# Altium PCB ch347-hs-usb-bridge.PcbDoc
Units mm, origin at the board's own origin, x right, y up, seen from the top; angles counter-clockwise.
Board outline 78 x 26 mm, 2 copper layers (Top Layer, Bottom Layer); 39 components, 42 nets, 181 pads, 159 vias.
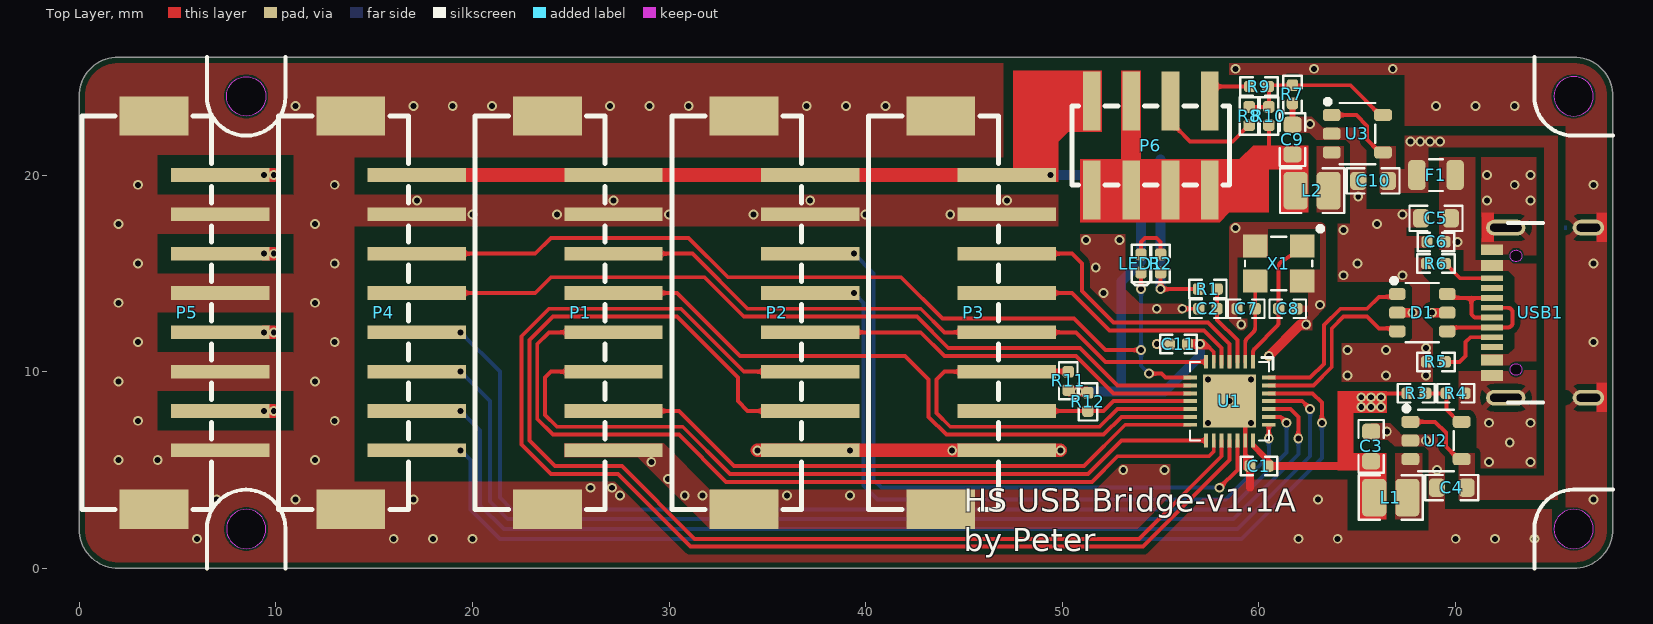
[diagram p0: Top Layer view]
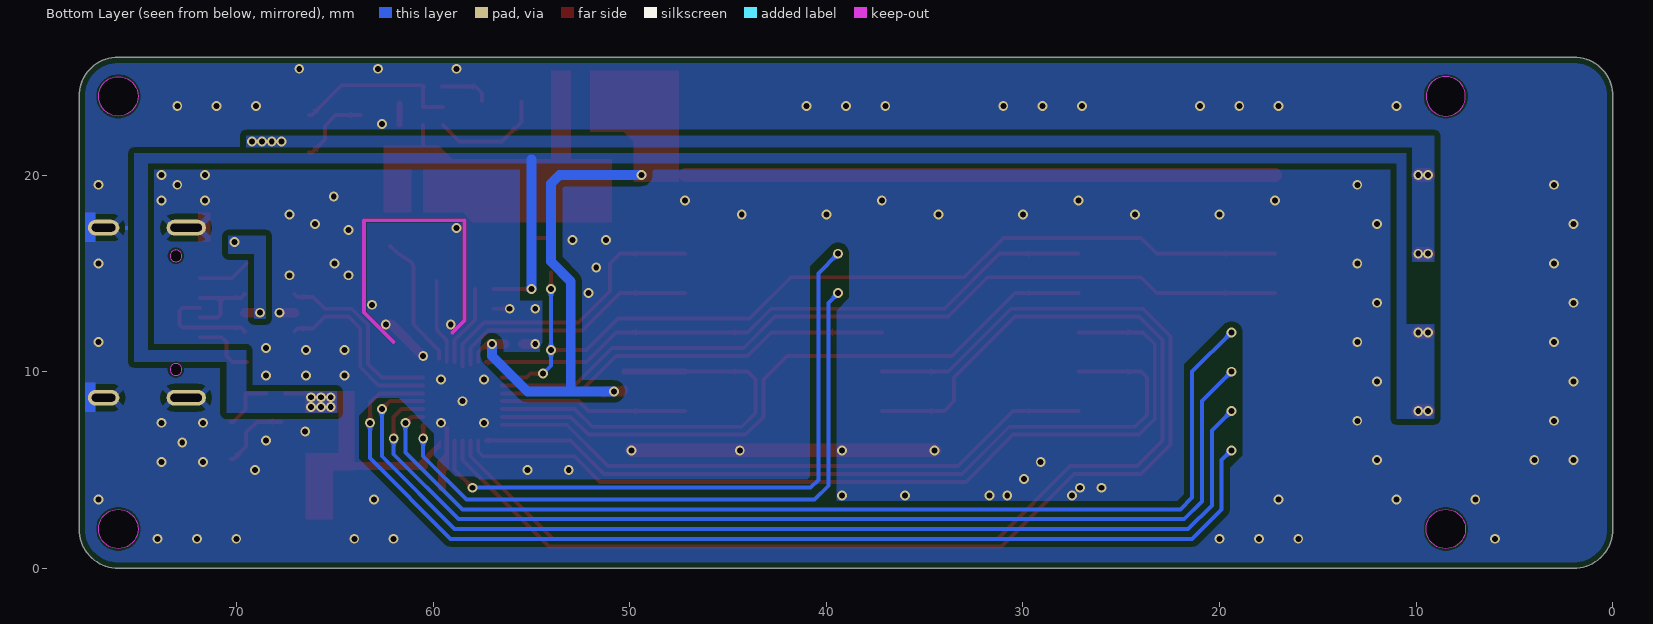
[diagram p1: Bottom Layer view, seen from below]
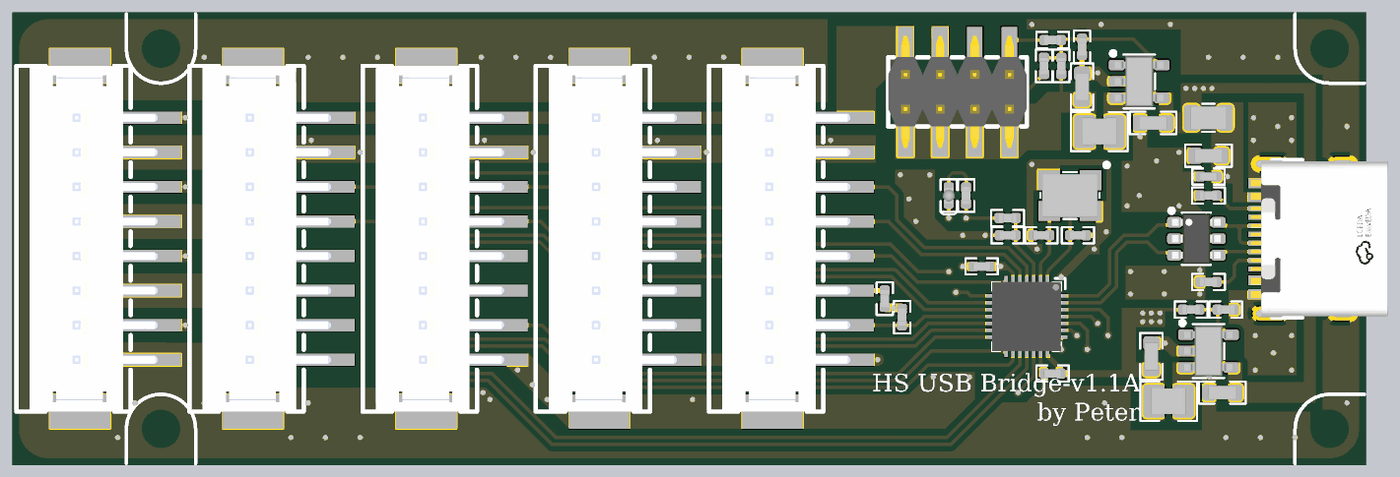
[diagram p2: 3D render of the assembled board from above, using the file's embedded part models]

## Layer stack, top to bottom
Top Solder: solder mask 0.0102, Solder Resist, Dk 3.5
Top Layer: signal copper 0.0356
Dielectric 1: dielectric 0.32, FR-4, Dk 4.8
Bottom Layer: signal copper 0.0356
Bottom Solder: solder mask 0.0102, Solder Resist, Dk 3.5

## Board outline
0,2 0,24 cw(c2,24) 2,26 76,26 cw(c76,24) 78,24 78,2 cw(c76,2) 76,0 2,0 cw(c2,2)
cut-out: 7.5,2 ccw(c8.5,2) 8.5,1 ccw(c8.5,2) 9.5,2 ccw(c8.5,2) 8.5,3 ccw(c8.5,2)
cut-out: 8.5,23 cw(c8.5,24) 7.5,24 cw(c8.5,24) 8.5,25 cw(c8.5,24) 9.5,24 cw(c8.5,24)
cut-out: 75,2 ccw(c76,2) 76,1 ccw(c76,2) 77,2 ccw(c76,2) 76,3 ccw(c76,2)
cut-out: 75,24 ccw(c76,24) 76,23 ccw(c76,24) 77,24 ccw(c76,24) 76,25 ccw(c76,24)

## Design rules (kind name [scope] priority, off if disabled: settings)
BoardOutlineClearance [All] p1: gap=0.3 ignorepadtopadclearanceinfootprint=FALSE except(0.1: Poly-CutoutEdge)
Clearance Clearance_1 [InNet('GND') And OnLayer('Bottom Layer') vs IsKeepOut] p1: gap=0.3 ignorepadtopadclearanceinfootprint=TRUE except(0: Track-Poly; 0.1: Poly-Region; 0.2: Arc-Arc Arc-Track Arc-SMDPad Arc-Via Track-Track Track-SMDPad Track-Via SMDPad-Via)
Clearance Clearance_2 [InNet('USB5V') vs InNet('NetR6_2') or InNet('GND') or InNet('B8') or InComponent('USB1')] p2: gap=0.3 ignorepadtopadclearanceinfootprint=TRUE except(0.1: Poly-Region; 0.225: SMDPad-Poly; 0.25: Track-Poly)
Clearance [All] p3: gap=0.3 ignorepadtopadclearanceinfootprint=TRUE except(0.1: Poly-Region; 0.2: Arc-Arc Arc-Track Arc-SMDPad Arc-Via Track-Track Track-SMDPad Track-Via SMDPad-Via)
DiffPairsRouting [All] p1: maxlimit=0.3 minlimit=0.15 mostfreqgap=0.2 toplayer_minwidth=0.15 toplayer_maxwidth=0.3 toplayer_prefwidth=0.2 bottomlayer_minwidth=0.15 bottomlayer_maxwidth=0.3 bottomlayer_prefwidth=0.2 maxuncoupledlength=5
HoleToHoleClearance [All] p1: gap=0.2 allowstackedmicrovias=TRUE
MinimumSolderMaskSliver [All] p1: minsoldermaskwidth=0.1
PolygonConnect PolygonConnect_1 [not InNet('GND')] p1: connectstyle=Direct reliefconductorwidth=0.254 reliefentries=4 polygonreliefangle="90 Angle" airgapwidth=0.254
PolygonConnect [All] p2: thpad.connectstyle=Relief thpad.reliefconductorwidth=0.3 thpad.reliefentries=4 thpad.polygonreliefangle="45 Angle" thpad.airgapwidth=0.3 smdpad.connectstyle=Direct smdpad.reliefconductorwidth=0.3 smdpad.reliefentries=4 smdpad.polygonreliefangle="90 Angle" smdpad.airgapwidth=0.3 via.connectstyle=Direct via.reliefconductorwidth=0.254 via.reliefentries=4 via.polygonreliefangle="90 Angle" via.airgapwidth=0.254
RoutingVias [All] p1: holewidth=0.3 width=0.5 viastyle="Through Hole" minholewidth=0.25 minwidth=0.4 maxholewidth=0.8 maxwidth=1
SilkToSolderMaskClearance [IsPad] p1: minsilkscreentomaskgap=0.1 clearancetoexposedcopper=TRUE
SolderMaskExpansion [All] p1: expansion=0.102 istentingtop=FALSE
Width [All] p1: maxlimit=1 minlimit=0.1 preferedwidth=0.3
26 further rules are at their usual default settings.

## Classes and differential pairs
component class type-c: C5 C6 D1 R5 R6 USB1
component class osc: C7 C8 X1
component class m3406: C3 C4 C9 C10 F1 L1 L2 R3 R4 R7 R8 R9 R10 U2 U3
component class interface: P1 P2 P3 P4 P5 P6
component class ch347f: C1 C2 C11 LED1 R1 R2 R11 R12 U1
differential pair UD: +UD_P -UD_N

## Components (designator, comment, footprint, x,y, rotation, side; value= is the part's Value field where it differs from the comment)
C1 "Capacitor" CAPC100X50X55L25N 60,5.2 r0 top value=100n
C2 "Capacitor" CAPC100X50X55L25N 57.4,13.2 r0 top value=100n
C3 "Capacitor" CAPC160X80X90L30N 65.7,6.2 r270 top value=10u
C4 "Capacitor" CAPC160X80X90L30N 69.8,4.1 r0 top value=10u
C5 "Capacitor" CAPC160X80X90L30N 69,17.8 r0 top value=10u
C6 "Capacitor" CAPC100X50X55L25N 69,16.6 r0 top value=100n
C7 "Capacitor" CAPC100X50X55L25N 59.348,13.2 r180 top value=10p
C8 "Capacitor" CAPC100X50X55L25N 61.462,13.2 r180 top value=10p
C9 "Capacitor" CAPC160X80X90L30N 61.7,21.8 r270 top value=10u
C10 "Capacitor" CAPC160X80X90L30N 65.8,19.7 r0 top value=10u
C11 "Capacitor" CAPC100X50X55L25N 55.9,11.4 r0 top value=100n
D1 "USBLC6-2SC6" fp-0018 68.3,13 r270 top
F1 "SMD0805B050TF" FUSC210X135X125L37N 69,20 r180 top
L1 "Inductor" INDC200X160X105L60N 66.7,3.6 r180 top value=2u2
L2 "Inductor" INDC200X160X105L60N 62.7,19.2 r180 top value=2u2
LED1 "蓝灯 正贴" LEDC100X50X45L25N 54,15.5 r90 top
P1 "SPI" CONN-SMD_PH2.0-8P-LT 25.5,13 r270 top
P2 "UART0/IO0_2" CONN-SMD_PH2.0-8P-LT 35.5,13 r270 top
P3 "UART1/I2C" CONN-SMD_PH2.0-8P-LT 45.5,13 r270 top
P4 "JTAG/SWD/IO3_7" CONN-SMD_PH2.0-8P-LT 15.5,13 r270 top
P5 "Power" CONN-SMD_PH2.0-8P-LT 5.5,13 r270 top
P6 "VIO SEL" CONN-SMD_HX-PZ2.0-2X4P-TP 54.5,21.5 r0 top
R1 "Resistor" RESC100X50X35L25N 57.4,14.2 r0 top value=4k7
R2 "Resistor" RESC100X50X35L25N 55,15.5 r90 top value=470
R3 "Resistor" RESC100X50X35L25N 68,8.9 r180 top value=100k
R4 "Resistor" RESC100X50X35L25N 70,8.9 r180 top value=22k1
R5 "Resistor" RESC100X50X35L25N 69,10.5 r180 top value=4k7
R6 "Resistor" RESC100X50X35L25N 69,15.5 r0 top value=4k7
R7 "Resistor" RESC100X50X35L25N 61.7,24.1 r90 top value=22k1
R8 "Resistor" RESC100X50X35L25N 59.5,23 r270 top value=237k
R9 "80.6k" RESC100X50X35L25N 60,24.5 r180 top value=20k
R10 "Resistor" RESC100X50X35L25N 60.5,23 r270 top value=100k
R11 "Resistor" RESC100X50X35L25N 50.3,9.535 r270 top value=4k7
R12 "Resistor" RESC100X50X35L25N 51.3,8.465 r90 top value=4k7
U1 "CH347F" QFN-28_L4.0-W4.0-P0.40-BL-EP2.7 58.5,8.5 r180 top
U2 "M3406-ADJ" SOT23-5P95_280X110L37X40N 69,6.5 r270 top
U3 "M3406-ADJ" SOT23-5P95_280X110L37X40N 65,22.1 r270 top
USB1 "USB-TYPE-C-018" USB-TYPE-C-018 74.3,13 r90 top
X1 "TAXM8M4RDBCCT2T" OSCCC320X250X80L90X100N 61,15.5 r180 top

## Footprints (in the part's own frame and the unit in brackets; to place one, negate y for a bottom-side part, rotate by r counter-clockwise, add the part's x,y. Pads: shape width x height; smd on the part's side, far side on the other; paste and mask are expansions set on the pad)
CAPC100X50X55L25N [mm] "Capacitor, Chip; 1.00 mm L X 0.50 mm W X 0.55 mm H body"
  rrect50% 0.575x0.58 smd: 1(-0.462,0) 2(0.462,0)
  silkscreen extent -0.93,-0.47 0.93,0.47, body extent -0.5,-0.25 0.5,0.25, height 0.55
CAPC160X80X90L30N [mm] "Capacitor, Chip; 1.60 mm L X 0.80 mm W X 0.90 mm H body"
  rrect49% 0.82x0.929 smd: 1(-0.755,0) 2(0.755,0)
  silkscreen extent -1.35,-0.64 1.35,0.64, body extent -0.8,-0.4 0.8,0.4, height 0.9
CONN-SMD_HX-PZ2.0-2X4P-TP [mm]
  rect 0.89x3 smd: 1(-3,2.25) 2(-1,2.25) 3(1,2.25) 4(3,2.25) 5(3,-2.25) 6(1,-2.25) 7(-1,-2.25) 8(-3,-2.25)
  silkscreen extent -4,-2 4,2, body extent -4,-3.25 4,3.25, height 6.3
CONN-SMD_PH2.0-8P-LT [mm]
  rect 0.7x5 smd paste+0 mask+0.05: 1(-7,1.679) 2(-5,1.679) 3(-3,1.679) 4(-1,1.679) 5(1,1.679) 6(3,1.679) 7(5,1.679) 8(7,1.679)
  rect 2x3.5 smd paste+0 mask+0.05: 9(-10,-1.679) 10(10,-1.679)
  silkscreen extent -10,-5.35 10,1.25, body extent -10,-4.59 10,2.81, height 6.55
fp-0018 [mm] "SOT23-6P95_280X125L45X40N, Small Outline Transistor, SOT-23 Type, 0.95 mm pitch; 6 pin, 2.92 mm L X 1.60 mm W X 1.25 mm H body"
  rrect50% 0.609x0.835 smd: 1(-0.95,-1.268) 2(0,-1.268) 3(0.95,-1.268) 4(0.95,1.268) 5(0,1.268) 6(-0.95,1.268)
  silkscreen extent -1.75,-1.56 1.51,0.85, body extent -1.46,-1.4 1.46,1.4, height 1.25
FUSC210X135X125L37N [mm] "Fuse, Chip; 2.10 mm L X 1.35 mm W X 1.25 mm H body"
  rrect46% 0.879x1.52 smd: 1(-0.975,0) 2(0.975,0)
  silkscreen extent -0.36,-0.81 0.36,0.81, body extent -1.05,-0.67 1.05,0.67, height 1.25
INDC200X160X105L60N [mm] "Inductor, Chip; 2.00 mm L X 1.60 mm W X 1.05 mm H body"
  rrect33% 1.226x1.91 smd: 1(-0.842,0) 2(0.842,0)
  silkscreen extent -1.64,-1.13 1.64,1.13, body extent -1,-0.8 1,0.8, height 1.05
LEDC100X50X45L25N [mm] "LED, Chip; 1.00 mm L X 0.50 mm W X 0.45 mm H body"
  rrect50% 0.6x0.58 smd: A(0.465,0) C(-0.465,0)
  silkscreen extent -1.1,-0.47 0.94,0.47, body extent -0.5,-0.35 0.5,0.35, height 0.8
OSCCC320X250X80L90X100N [mm] "Oscillator, Corner Concave; 3.20 mm L X 2.50 mm W X 0.80 mm H body"
  rect 1.249x1.149 smd: 1(-1.19,-0.89) 2(1.19,-0.89) 3(1.19,0.89) 4(-1.19,0.89)
  silkscreen extent -2.24,-1.89 1.71,1.36, body extent -1.6,-1.25 1.6,1.25, height 0.85
QFN-28_L4.0-W4.0-P0.40-BL-EP2.7 [mm]
  rect 0.2x0.7 smd paste-100 mask+0.051: 1(-1.2,-2) 2(-0.8,-2) 3(-0.4,-2) 4(-0.001,-2) 5(0.4,-2) 6(0.8,-2) 7(1.2,-2) 15(1.2,2) 16(0.8,2) 17(0.4,2) 18(0,2) 19(-0.4,2) 20(-0.8,2) 21(-1.2,2)
  rect 0.7x0.2 smd paste-100 mask+0.051: 8(2,-1.2) 9(2,-0.8) 10(2,-0.4) 11(1.999,0) 12(2,0.4) 13(2,0.8) 14(2,1.2) 22(-2,1.2) 23(-2,0.8) 24(-2,0.4) 25(-2,0) 26(-2,-0.4) 27(-2,-0.8) 28(-2,-1.2)
  rect 2.7x2.7 smd paste-100 mask+0.051: 29(0,0)
  silkscreen extent -2.22,-2.21 2,2, body extent -2.01,-2.01 2.01,2.01, height 0.75
RESC100X50X35L25N [mm] "Resistor, Chip; 1.00 mm L X 0.50 mm W X 0.35 mm H body"
  rrect50% 0.6x0.58 smd: 1(-0.465,0) 2(0.465,0)
  silkscreen extent -0.94,-0.47 0.94,0.47, body extent -0.5,-0.25 0.5,0.25, height 0.35
SOT23-5P95_280X110L37X40N [mm] "Small Outline Transistor, SOT-23 Type, 0.95 mm pitch; 5 pin, 2.90 mm L X 1.60 mm W X 1.10 mm H body"
  rrect50% 0.609x0.905 smd: 1(-0.95,-1.303) 2(0,-1.303) 3(0.95,-1.303) 4(0.95,1.303) 5(-0.95,1.303)
  silkscreen extent -1.75,-1.63 1.56,0.91, body extent -1.45,-1.4 1.45,1.4, height 1.1
USB-TYPE-C-018 [mm]
  rect 0.3x1.1 smd mask+0.05: A1(-3.325,2.45) A4(-2.525,2.45) A5(-1.25,2.45) A6(-0.25,2.45) A7(0.25,2.45) A8(1.25,2.45) A9(2.525,2.45) A12(3.325,2.45) B1(3.075,2.45) B4(2.275,2.45) B5(1.75,2.45) B6(0.75,2.45) B7(-0.75,2.45) B8(-1.75,2.45) B9(-2.275,2.45) B12(-3.075,2.45)
  oval 0.8x1.6 hole 0.4 slot 1.2 at 90 deg: SH1(-4.325,-2.45) SH2(4.325,-2.45)
  oval 0.8x2 hole 0.4 slot 1.6 at 90 deg: SH3(4.325,1.75) SH4(-4.325,1.75)
  Keep-Out Layer board cut-out: -2.89,0.93 -3.005,0.953 -3.102,1.018 -3.167,1.115 -3.19,1.23 -3.19,1.23 -3.167,1.345 -3.102,1.442 -3.005,1.507 -2.89,1.53 -2.89,1.53 -2.775,1.507 -2.678,1.442 -2.613,1.345 -2.59,1.23 -2.59,1.23 -2.613,1.115 -2.678,1.018 -2.775,0.953 -2.89,0.93
  Keep-Out Layer board cut-out: 2.89,0.93 2.775,0.953 2.678,1.018 2.613,1.115 2.59,1.23 2.59,1.23 2.613,1.345 2.678,1.442 2.775,1.507 2.89,1.53 2.89,1.53 3.005,1.507 3.102,1.442 3.167,1.345 3.19,1.23 3.19,1.23 3.167,1.115 3.102,1.018 3.005,0.953 2.89,0.93
  silkscreen extent -4.57,-0.14 4.57,1.64, body extent -4.47,-5.05 4.47,2.85, height 3.25

## Part data
C1 C2 C6 C11: library part GRM188R61E106KA73D, Case/Package=0402, Manufacturer=CCTC(三环), MPN=TCC0402X5R104M250AT, Mounting Type=SMD, 编号=C359190
C3 C4 C5 C9 C10: library part GRM188R61E106KA73D, Case/Package=0603, Manufacturer=CCTC(三环), MPN=TCC0603X5R106K100CT, Mounting Type=SMD, 编号=C380314
C7 C8: library part GRM188R61E106KA73D, Case/Package=0402, Manufacturer=YAGEO(国巨), MPN=CC0402JRNPO9BN100, Mounting Type=SMD, 编号=C106199
D1: library part CMP-0000065, "15V 6V SOT-23-6 Electrostatic and Surge Protection (TVS/ESD) ROHS", LCSC PN=C2687116, Manufacturer=UMW, Category=TVS/ESD, ComponentLink1Description="Product Link", ComponentLink1URL=https://www.lcsc.com/product-detail/Electrostatic-and-Surge-Protection-TVS-ESD_UMW-Youtai-Semiconductor-Co-Ltd-USBLC6-2SC6_C2687116.html, ComponentLink2Description="Datasheet Link", ComponentLink2URL=https://datasheet.lcsc.com/lcsc/2311091738_UMW-Youtai-Semiconductor-Co---Ltd--USBLC6-2SC6_C2687116.pdf, CPN=000000, ID=CMP-0000065, MPN=USBLC6-2SC6
F1: library part "Fuse 1", "Fuse", 编号=C269104
L1 L2: library part WPN201610U2R2MTY01, Case/Package=201610, Manufacturer=DDY(德立), MPN=SFE201610-2R2M, Mounting Type=SMD, 编号=C5159659
LED1: library part LED-SMD, "贴片LED", 编号=C965795
P1 P2 P3 P4 P5: library part "Header 8", "Header, 8-Pin", LatestRevisionDate=17-Jul-2002, LatestRevisionNote="Re-released for DXP Platform.", Publisher="Altium Limited"
P6: library part "Header 4X2A", "Header, 4-Pin, Dual row", LatestRevisionDate=17-Jul-2002, LatestRevisionNote="Re-released for DXP Platform.", Publisher="Altium Limited"
R1 R5 R6 R11 R12: library part RC0402FR-07100KL, Case/Package=0402, Manufacturer=RALEC(旺诠), MPN=RTT02472JTH, Mounting Type=SMD, 编号=C103059
R2: library part RC0402FR-07100KL, Case/Package=0402, Manufacturer=RALEC(旺诠), MPN=RTT02471JTH, Mounting Type=SMD, 编号=C103058
R3 R10: library part RC0402FR-07100KL, Case/Package=0402, Manufacturer=RALEC(旺诠), MPN=RTT021003FTH, Mounting Type=SMD, 编号=C102750
R4 R7: library part RC0402FR-0722K1L, Case/Package=0402, Manufacturer=RALEC(旺诠), MPN=RTT022212FTH, Mounting Type=SMD, 编号=C102896
R8: library part RC0402FR-07100KL, Case/Package=0402, Manufacturer=UNI-ROYAL(厚声), MPN=0402WGF2373TCE, Mounting Type=SMD, 编号=C27001
R9: library part RC0402FR-07100KL, Case/Package=0402, Manufacturer=FH(风华), MPN=RC-02W8062FT, Mounting Type=SMD, 编号=C304637
U1: "High Speed USB to UART + SPI + IIC + JTAG"
U2 U3: "Vin=2V~6V,800mA,DCDC", Manufacturer=西安航天民芯, Mounting Type=SMD, MPN=M3406-ADJ, 编号=C83224
X1: library part X32258MSB4SI, "8MHz ±10ppm 10pF", Manufacturer=TAE(雅晶鑫), 编号=C400090
USB1: 编号=C2927038

## Via types
v1: diameter 0.5, hole 0.3, Top Layer to Bottom Layer, tented both sides, 159 vias

## Nets (pads, with @x,y where several pads share a name; then routed paths per layer and width w, separated by ;. In a path a pad name is that pad's centre, name@x,y a point inside that pad or via, vN(x,y) a via of type N, cw(c..) or ccw(c..) an arc to the next point about the centre after c; other vN are vias at no path point)
1V8: P6.4 R9.2 | length 2.6
  Top Layer w0.2: P6.4 57.5,24.155 57.845,24.5 R9.2
2V5: P6.3 R8.2 | length 5.8
  Top Layer w0.2: P6.3 55.5,22.695 55.845,22.35 55.85,22.35 56.5,21.7 58.665,21.7 R8.2
3V3: C1.2 C3.2 L1.2 P5.5 P5.7 R1.1 R2.1 R3.2 U1.21 | length 15.1
  Top Layer w0.2: R2.1 v1(55,14.2) R1.1 ; 66.4,8.9 R3.2
  Top Layer w0.4: C1.2 64.1,5.2
  Top Layer w0.7: v1(9.4,8) v1(9.9,8) ; v1(9.4,12) v1(9.9,12)
  Bottom Layer w0.5: v1(55,14.2) 55,20.8
  other v1: 65.2,8.2 65.7,8.2 66.2,8.2 65.2,8.7 65.7,8.7 66.2,8.7
5V: C4.2 C10.2 F1.2 P5.1 P5.3 U2.1 U2.4 U3.1 U3.4 | length 8.6
  Top Layer w0.2: U3.1 64.95,23.05 65.5,22.5 65.5,21.8 66.15,21.15 U3.4 ; U2.1 68.95,7.45 69.5,6.9 69.5,6.2 70.15,5.55 U2.4
  Top Layer w0.7: v1(9.4,16) v1(9.9,16) ; v1(9.4,20) v1(9.9,20)
  other v1: 67.7,21.7 68.2,21.7 68.7,21.7 69.2,21.7
CTS0/IO0: P2.7 U1.17 | length 62.4
  Top Layer w0.2: P2.7 34,8 33.5,8.5 33.5,9.7 30.4,12.8 24.1,12.8 22.9,11.6 22.9,6.5 24.2,5.2 27.6,5.2 31.3,1.5 53.9,1.5 58.1,5.7 U1.17
D+: D1.6 USB1.A6 USB1.B6 | length 4.4
  Top Layer w0.2: D1.6@69.613,13.95 D1.6 69.768,13.75 70.8,13.75 ; USB1.A6 71.05,12.75 cw(c71.05,13) 70.8,13 70.8,13.75 ; USB1.B6 70.8,13.75
D-: D1.4 USB1.A7 USB1.B7 | length 5.3
  Top Layer w0.2: D1.4@69.613,12.05 D1.4 69.768,12.25 USB1.B7 72.65,12.25 ccw(c72.65,12.5) 72.9,12.5 72.9,13 ccw(c72.65,13) 72.65,13.25 USB1.A7
DTR0/TNOW0/IO2: P2.5 U1.10 | length 20.6
  Top Layer w0.2: P2.5 42.8,12 44,10.8 50.7,10.8 52.6,8.9 U1.10
GND: C1.1 C2.1 C3.1 C4.1 C5.1 C6.1 C7.2 C8.1 C9.1 C10.1 C11.1 D1.2 P1.2 P1.8 P1.9 P1.10 P2.2 P2.8 P2.9 P2.10 P3.2 P3.8 P3.9 P3.10 P4.2 P4.9 P4.10 P5.2 P5.4 P5.6 P5.8 P5.9 P5.10 R4.1 R5.2 R6.1 R7.1 U1.20 U1.29 U2.2 U3.2 USB1.A1 USB1.A12 USB1.B1 USB1.B12 USB1.SH1 USB1.SH2 USB1.SH3 USB1.SH4 X1.2 X1.4 | length 22.4
  Top Layer w0.2: v1(56.101,13.2) C2.1
  Top Layer w0.3: C9.1 R7.1
  Top Layer w0.4: 59.538,4.1 C1.1
  Top Layer w0.5: v1(54.8,11.4) C11.1 ; v1(60.5,10.8) 62.1,12.4 v1(62.4,12.4) v1@62.42,12.4 ; D1.2 v1(67.8,13)
  Top Layer w0.7: v1(34.5,6) P2.8 P3.8 v1(49.9,6)
  other v1: 6,1.5 16,1.5 18,1.5 20,1.5 62,1.5 64,1.5 70,1.5 72,1.5 74,1.5 7,3.5 11,3.5 17,3.5 63,3.5 77,3.5 27.5,3.7 30.8,3.7 31.7,3.7 36,3.7 39.2,3.7 26,4.1 27.1,4.1 29.95,4.55 53.1,5 55.2,5 69.045,5 29.1,5.4 71.7,5.4 73.8,5.4 2,5.5 4,5.5 12,5.5 39.2,6 44.4,6 72.75,6.4 68.5,6.5 66.5,6.955 57.4,7.4 59.6,7.4 71.7,7.4 73.8,7.4 3,7.5 13,7.5 58.5,8.5 2,9.5 12,9.5 57.4,9.6 59.6,9.6 64.5,9.8 66.45,9.8 68.5,9.8 64.5,11.1 66.45,11.1 68.5,11.2 3,11.5 13,11.5 77,11.5 59.1,12.4 54.8,13.2 63.1,13.4 2,13.5 12,13.5 52.1,14 64.3,14.9 67.3,14.9 51.7,15.3 3,15.5 13,15.5 65,15.5 77,15.5 51.2,16.7 52.9,16.7 64.3,17.2 58.8,17.3 2,17.5 12,17.5 66,17.5 20,18 24.3,18 30,18 34.3,18 40,18 44.3,18 67.3,18 17.179,18.7 27.179,18.7 37.179,18.7 47.179,18.7 71.6,18.7 73.8,18.7 65.045,18.9 3,19.5 13,19.5 73,19.5 77,19.5 71.6,20 73.8,20 62.6,22.6 11,23.5 17,23.5 19,23.5 21,23.5 27,23.5 29,23.5 31,23.5 37,23.5 39,23.5 41,23.5 69,23.5 71,23.5 73,23.5 58.8,25.4 62.8,25.4 66.8,25.4
INT_VIO: C9.2 L2.2 P6.2 P6.5 P6.6 P6.7 P6.8 R10.2 | length 1.3
  Top Layer w0.2: 60.5,21.254 R10.2
MISO: P1.6 U1.15 | length 41.1
  Top Layer w0.2: P1.6 24,10 23.7,9.7 23.7,7.8 24.3,7.2 30.7,7.2 33.1,4.8 51.3,4.8 53,6.5 U1.15
MOSI: P1.5 U1.16 | length 44.8
  Top Layer w0.2: P1.5 23.9,12 23.3,11.4 23.3,7.6 24.1,6.8 30.5,6.8 32.9,4.4 51.5,4.4 52.8,5.7 57.45,5.7 57.7,5.95 U1.16
NetC2_2: C2.2 R1.2 U1.3 | length 4.1
  Top Layer w0.2: R1.2 57.863,14.198 57.863,13.201 C2.2 57.862,12.638 58.9,11.6 U1.3
NetC7_1: C7.1 U1.2 X1.3 | length 4.3
  Top Layer w0.2: U1.2 59.3,11.476 cw(c59.6,11.476) 59.388,11.688 59.722,12.022 ccw(c59.51,12.234) 59.81,12.234 C7.1 X1.3
NetC8_2: C8.2 U1.1 X1.1 | length 6.8
  Top Layer w0.2: U1.1@59.7,10.674 59.7,10.976 cw(c60,10.976) 59.787,11.187 60.913,12.313 ccw(c60.7,12.524) 61,12.524 61,15.337 cw(c61.3,15.337) 61.136,15.589 61.716,15.966 X1.1
NetL1_1: L1.1 U2.3
NetL2_1: L2.1 U3.3
NetLED1_A: LED1.A R2.2 | length 2.4
  Top Layer w0.2: LED1.A 54,16.6 54.2,16.8 54.8,16.8 55,16.6 R2.2
NetR3_1: R3.1 R4.2 U2.5 | length 2.9
  Top Layer w0.2: R3.1 R4.2 69.535,8.07 70.155,7.45 U2.5
NetR5_1: R5.1 USB1.A5 | length 3.3
  Top Layer w0.2: R5.1 70.2,10.5 70.5,10.8 70.5,11.5 70.75,11.75 USB1.A5
NetR6_2: R6.2 USB1.B5 | length 2.7
  Top Layer w0.2: R6.2@69.475,15.5 70.225,14.75 USB1.B5
NetR7_2: R7.2 R8.1 R9.1 R10.1 U3.5 | length 8.5
  Top Layer w0.2: R8.1 R10.1 60.5,24.465 R9.1 60.53,24.565 R7.2 64.646,24.565 66.161,23.05 U3.5
RTS0/IO1: P2.6 U1.18 | length 63.1
  Top Layer w0.2: P2.6 33.8,10 30.6,13.2 23.9,13.2 22.5,11.8 22.5,6.3 24,4.8 27.4,4.8 31.1,1.1 54.1,1.1 58.5,5.5 U1.18
RXD0: P2.4 U1.22 | length 33.4
  Top Layer w0.2: v1(60.5,6.6) U1.22
  Bottom Layer w0.2: v1(39.4,14) 39.9,13.5 39.9,4.2 40.6,3.5 58.3,3.5 60.5,5.7 v1(60.5,6.6)
RXD1: P3.4 U1.5 | length 12.9
  Top Layer w0.2: P3.4 50.5,14 52.4,12.1 57.2,12.1 58.1,11.2 U1.5@58.1,10.366
SCK: P1.7 U1.14 | length 31.4
  Top Layer w0.2: P1.7 30.5,8 33.3,5.2 51.1,5.2 53.2,7.3 U1.14
SCL/CTS1: P3.7 R12.1 U1.11 | length 9.5
  Top Layer w0.2: P3.7 R12.1 52.1,8 52.6,8.5 U1.11
SCS0: P1.4 U1.13 | length 33.8
  Top Layer w0.2: P1.4 30.4,14 33.6,10.8 42,10.8 43.2,9.6 43.2,7.7 44.1,6.8 52.1,6.8 53,7.7 U1.13
SCS1/DTR1/TNOW1: P1.3 P3.5 U1.7 | length 32.4
  Top Layer w0.2: P1.3 31.2,16 34,13.2 42.8,13.2 44,12 P3.5 50.7,12 52.2,10.5 U1.7
SDA/RTS1: P3.6 R11.1 U1.12 | length 22.1
  Top Layer w0.2: P3.6 44,10 43.6,9.6 43.6,7.9 44.3,7.2 51.9,7.2 52.8,8.1 U1.12
  Top Layer w0.3: P3.6 R11.1
SRST/ACT: LED1.C P4.3 U1.8 | length 47
  Top Layer w0.2: P4.3 23.2,16 24,16.8 31,16.8 33,14.8 41.8,14.8 43.9,12.7 50.6,12.7 52.2,11.1 v1(54,11.1) ; v1(54,14.2) LED1.C ; v1(54.4,9.9) 55.05,9.9 55.25,9.7 U1.8
  Bottom Layer w0.2: v1(54,14.2) 54,10.3 v1(54.4,9.9)
TCK/SWDCK/IO4: P4.5 U1.23 | length 53.2
  Top Layer w0.2: U1.23 61.1,7.7 v1(61.4,7.4)
  Bottom Layer w0.2: v1(19.4,12) 21.4,10 21.4,3.6 22,3 58.5,3 61.4,5.9 v1(61.4,7.4)
TDI/IO6: P4.7 U1.25 | length 54.1
  Top Layer w0.2: U1.25 62.2,8.5 v1(62.6,8.1)
  Bottom Layer w0.2: v1(19.4,8) 20.4,7 20.4,3.2 21.6,2 58.9,2 62.6,5.7 v1(62.6,8.1)
TDO/IO5: P4.6 U1.24 | length 53.6
  Top Layer w0.2: U1.24 61.6,8.1 62,7.7 v1(62,6.6)
  Bottom Layer w0.2: v1(19.4,10) 20.9,8.5 20.9,3.4 21.8,2.5 58.7,2.5 62,5.8 v1(62,6.6)
TMS/SWDIO/IO7: P4.8 U1.26 | length 54.5
  Top Layer w0.2: U1.26 62.725,8.9 63.2,8.424 v1(63.2,7.4)
  Bottom Layer w0.2: v1(19.4,6) 19.9,5.5 19.9,3 21.4,1.5 59.1,1.5 63.2,5.6 v1(63.2,7.4)
TRST/IO3: P4.4 U1.9 | length 41.9
  Top Layer w0.2: P4.4 23.2,14 24,14.8 31.8,14.8 33.8,12.8 42.6,12.8 44.2,11.2 50.9,11.2 52.8,9.3 U1.9
TXD0: P2.3 U1.19 | length 32.5
  Top Layer w0.2: v1(58,4.1) 58.9,5 U1.19
  Bottom Layer w0.2: v1(39.4,16) 40.4,15 40.4,4.5 40.8,4.1 v1(58,4.1)
TXD1: P3.3 U1.4 | length 15.2
  Top Layer w0.2: P3.3 50.5,16 51,15.5 51,14.1 52.6,12.5 57.4,12.5 58.501,11.399 U1.4@58.501,10.253
UD_N: D1.3 U1.27 | length 9.4
  Top Layer w0.2: U1.27@60.5,9.3 62.766,9.3 63.7,10.234 63.7,12.2 64.3,12.8 65.5,12.8 66.098,12.202 66.88,12.202 D1.3
UD_P: D1.1 U1.28 | length 9.4
  Top Layer w0.2: U1.28 62.6,9.7 63.3,10.4 63.3,12.366 64.134,13.2 65.5,13.2 66.098,13.798 66.88,13.798 D1.1
USB5V: C5.2 C6.2 D1.5 F1.1 USB1.A4 USB1.A9 USB1.B4 USB1.B9 | length 0.8
  Top Layer w0.5: v1(68.8,13) D1.5
  other v1: 70.1,16.6
VIO: C11.2 P1.1 P2.1 P3.1 P4.1 P6.1 R11.2 R12.2 U1.6 | length 56.4
  Top Layer w0.2: v1(57,11.4) 57.05,11.35 57.35,11.35 57.7,11 U1.6@57.7,10.502
  Top Layer w0.5: R11.2 50.3,9.06 50.34,9.02 50.35,9.02 50.37,9 v1(50.8,9) 51.23,9 51.25,8.98 51.26,8.98 51.3,8.94 R12.2 ; C11.2 v1(57,11.4)
  Top Layer w0.7: P4.1 P1.1 P2.1 P3.1
  Bottom Layer w0.5: v1(49.4,20) 53.561,20 54,19.561 54,15.6 53,14.6 53,9 ; v1(50.8,9) 53,9 ; v1(57,11.4) 57,10.8 55.2,9 53,9
pads on no net: USB1.A8 USB1.B8

## Polygon pours and split planes (outlines as drawn)
GND on Top Layer "GND_L01_P017" (solid, remove dead copper, pour order 17): 56.101,13.448 53.952,13.448 53.2,14.2 53.2,17 50.9,17 50.9,14.5 52.448,12.952 56.101,12.952
GND on Top Layer "GND_L01_P011" (solid, remove dead copper, pour order 11): 47,20.9 14,20.9 14,19 49.8,19 49.8,17.4 14,17.4 14,4.4 28.977,4.4 31.469,1.908 31.473,1.912 55.489,1.912 57.127,3.55 58.45,3.55 59.396,4.496 64.5,4.496 64.5,1.912 68.635,1.912 68.635,5.975 68.414,6.195 66.904,6.195 66.555,6.545 65.7,6.545 65.7,7.365 66.684,7.365 67.244,6.804 69.455,6.804 69.455,3 74.892,3 74.892,2.098 75.902,2.098 75.902,3.108 75.6,3.108 75.6,22.5 67.4,22.5 67.4,25.1 58.5,25.1 58.5,26 78,26 78,0 0,0 0,26 47,26
GND on Top Layer "GND_L01_P014" (solid, remove dead copper, pour order 14): 71.3,15.925 71.3,20.9 74.1,20.9 74.1,15.925 72.4,15.925
GND on Top Layer "GND_L01_P013" (solid, remove dead copper, pour order 13): 70.1,10.075 70.1,5.1 74.1,5.1 74.1,10.075
GND on Top Layer "GND_L01_P012" (solid, remove dead copper, pour order 12): 24.679,6.35 29.721,6.35 32.071,4 51.7,4 53,5.3 55.5,5.3 55.5,3.7 53.8,2 32.071,2 28.421,5.65 24.679,5.65
GND on Top Layer "GND_L01_P010" (solid, remove dead copper, pour order 10): 67.537,14.563 67.8,14.3 67.8,11.7 67.537,11.437 64.2,11.437 64.2,9.499 68.835,9.499 68.835,18.264 65.455,18.264 65.455,22.404 63.244,22.404 62.684,22.965 61.7,22.965 61.7,22.145 62.555,22.145 62.904,21.795 64.414,21.795 64.635,21.575 64.635,17.512 64,17.512 64,14.563 66.287,14.563
GND on Top Layer "GND_L01_P009" (solid, remove dead copper, pour order 9): 63.1,17.6 cw(c63.1,17.3) 63.4,17.3 63.4,13.3 62.7,12.6 62.7,12.1 58.5,12.1 58.5,17.3 cw(c58.8,17.3) 58.8,17.6
NetL2_1 on Top Layer "NONET_L-01_P-001" (solid, remove dead copper, pour order 7): 64.3,21.454 64.3,18.1 62.929,18.1 62.929,21.454
USB5V on Top Layer "NONET_L-01_P-001" (solid, remove dead copper, pour order 0): 73.13,10.325 73.13,10.518 74.1,10.518 74.1,15.482 73.13,15.482 73.13,15.675 71,15.675 71,20.9 69.174,20.9 69.174,16.2 70.4,16.2 70.4,15.125 72.675,15.125 73,14.8 73,11.2 72.675,10.875 71.3,10.875 71.3,10.325
NetL1_1 on Top Layer "NONET_L-01_P-001" (solid, remove dead copper, pour order 4): 68.3,5.854 68.3,2.5 66.929,2.5 66.929,5.854
5V on Top Layer "NONET_L-01_P-001" (solid, remove dead copper, pour order 1): 66.145,19.1 66.145,21.454 66.965,21.454 66.965,20.3 67.4,20.3 67.4,22 75.2,22 75.2,3.5 70.145,3.5 70.145,5.854 70.965,5.854 70.965,4.7 74.5,4.7 74.5,21.4 68.6,21.4 68.6,19.1
USB5V on Bottom Layer "USB5V_L02_P015" (solid, remove dead copper, pour order 15): 69.1,12.7 68.5,12.7 68.5,16.9 70.4,16.9 70.4,16 69.1,16
GND on Bottom Layer "GND_L02_P016" (solid, remove dead copper, pour order 16): 0,26 0,0 78,0 78,26
3V3 on Bottom Layer "3V3_L02_P008" (solid, remove dead copper, pour order 8): 10.5,12.4 9.1,12.4 9.1,7.6 11,7.6 11,20.6 74.5,20.6 74.5,11.1 69.5,11.1 69.5,9 64.9,9 64.9,7.9 70.5,7.9 70.5,10.5 75.2,10.5 75.2,21.1 10.5,21.1
5V on Bottom Layer "5V_L02_P006" (solid, remove dead copper, pour order 6): 10.2,21.4 10.2,15.6 9.1,15.6 9.1,22 69.5,22 69.5,21.4

## Keep-outs
Bottom Layer:
  lines w0.2: 59,12 58.4,12.6 58.4,17.7 63.5,17.7 63.5,13 62,11.5

## Other copper
Top Layer:
  region net GND: 77.694,9.45 77.15,9.45 77.15,7.95 77.694,7.95
  region net GND: 77.694,18.1 77.15,18.1 77.15,16.6 77.694,16.6
  rectangle net GND: 71.306,16.6 71.95,18.1
  pour cut-out: 4,19.009 4,21 10.9,21 10.9,18.991
  pour cut-out: 4,15.009 4,17 10.9,17 10.9,14.991
  pour cut-out: 4,11.009 4,13 10.9,13 10.9,10.991
  pour cut-out: 4,7.009 4,9 10.9,9 10.9,6.991
  pour cut-out: 62.5,12.852 62.248,12.6 62.015,12.6 62.015,11.221 60.1,11.221 60.1,12.7 58.886,12.7 58.886,15.816 60.434,15.816 60.434,17.264 63.114,17.264 63.114,15.184 61.566,15.184 61.566,14.035 62.5,14.035 62.5,13.346 61.924,13.346 61.924,13.054 62.5,13.054
  region net 3V3: 64.8,5.855 64.8,7.9 66.5,7.9 66.5,9 64,9 64,5 65.1,5 65.1,2.5 66.471,2.5 66.471,5.855
  region net VIO: 47.5,25.3 47.5,21.3 47.5,19.65 49.8,19.65 49.8,21.7 50.3,22.2 52,22.2 52,25.3
  region net INT_VIO: 54,20.8 54,25.3 53,25.3 53,20.8 50.9,20.8 50.9,17.6 58,17.6 58.5,18.1 60.5,18.1 60.5,20.3 61.1,20.3 61.1,18.1 62.5,18.1 62.5,21.5 59.7,21.5 59,20.8
  region net 3V3: 59.655,6.5 59.6,6.5 59.6,6.15 60.174,5.576 60.174,5.346 60.707,5.346 60.707,5.448
  region net GND: 59.293,4.955 59.783,4.955 59.783,5.448 59.4,5.831 59.4,7.2 59.2,7.2 59.2,5.044 59.293,4.952
  region net VIO: 56.9,11.152 57.452,11.152 57.57,11.27 57.191,11.648 56.9,11.648
  pour cut-out: 68.835,12.187 68.488,12.534 70.067,12.534 70.067,11.739 71.3,11.739 71.3,10.019 70.165,10.019 70.165,7.45 71.064,7.45 71.064,5.854 70.303,5.854 70.303,7.2 66.936,7.2 66.936,8.6 65.465,8.6 65.465,9.499 68.835,9.499
  pour cut-out: 69.011,13.55 68.691,13.55 68.691,14.553 68.54,14.704 68.245,14.999 68.245,15.21 68.538,15.21 68.538,15.79 67.9,15.79 67.9,16.31 68.538,16.31 68.538,16.89 67.5,16.89 67.5,17.336 68.245,17.336 68.245,18.264 66.992,18.264 66.992,19.1 69.011,19.1
Bottom Layer:
  rectangle net GND: 75.506,17.2 75.656,17.425
  region net GND: 77.694,18.1 77.15,18.1 77.15,16.6 77.694,16.6
  region net GND: 77.694,9.45 77.15,9.45 77.15,7.95 77.694,7.95
  pour cut-out: 63.75,5.573 62.277,4.1 58,4.1 58,4.541 58.109,4.65 58.873,4.65 59.95,5.727 59.95,6.85 61.75,8.65 62.85,8.65 63.75,7.75
  pour cut-out: 54.408,13.639 54.408,10.991 56.439,10.991 56.439,10.8 54,10.8 54,14.75 55.561,14.75 55.561,13.639
  pour cut-out: 38.85,15.891 38.85,13.75 39.492,13.108 39.492,3.408 40.808,3.408 40.808,15.37 39.866,16.312 39.712,16.312 39.4,16 38.959,16
  pour cut-out: 18.85,5.75 19.5,5.1 21.8,5.1 21.8,10.378 19.866,12.312 19.052,12.312 18.85,12.109
  pour cut-out: 8.794,15.6 8.794,12.4 9.1,12.4 9.1,15.6

## Silkscreen, mask and mechanical layers (free items; w line width, h text height)
Top Overlay:
  lines w0.2: 6.5,0 6.5,2 cw(c8.5,2) 10.5,2 10.5,0 ; 6.5,26 6.5,24 ccw(c8.5,24) 10.5,24 10.5,26 ; 74,0 74,2 cw(c76,2) 76,4 78,4 ; 74,26 74,24 ccw(c76,24) 76,22 78,22
  text "HS USB Bridge-v1.1A / by Peter" at 45,0.5 h2
Board Shape:
  circle w0.2: c8.5,24 r1
  circle w0.2: c8.5,2 r1
  circle w0.2: c76,2 r1
  circle w0.2: c76,24 r1
  lines w0.2: 0,2 ccw(c2,2) 2,0 76,0 ccw(c76,2) 78,2 78,24 ccw(c76,24) 76,26 2,26 ccw(c2,24) 0,24 0,2